# Altium PCB SEG_pressure gauge_up  V2.1.PcbDoc (part 1 of 5)
Units mm, origin at the board's own origin, x right, y up, seen from the top; angles counter-clockwise.
Board outline 67.74 x 67.74 mm, 2 copper layers (Top Layer, Bottom Layer); 36 components, 59 nets, 200 pads, 20 vias.
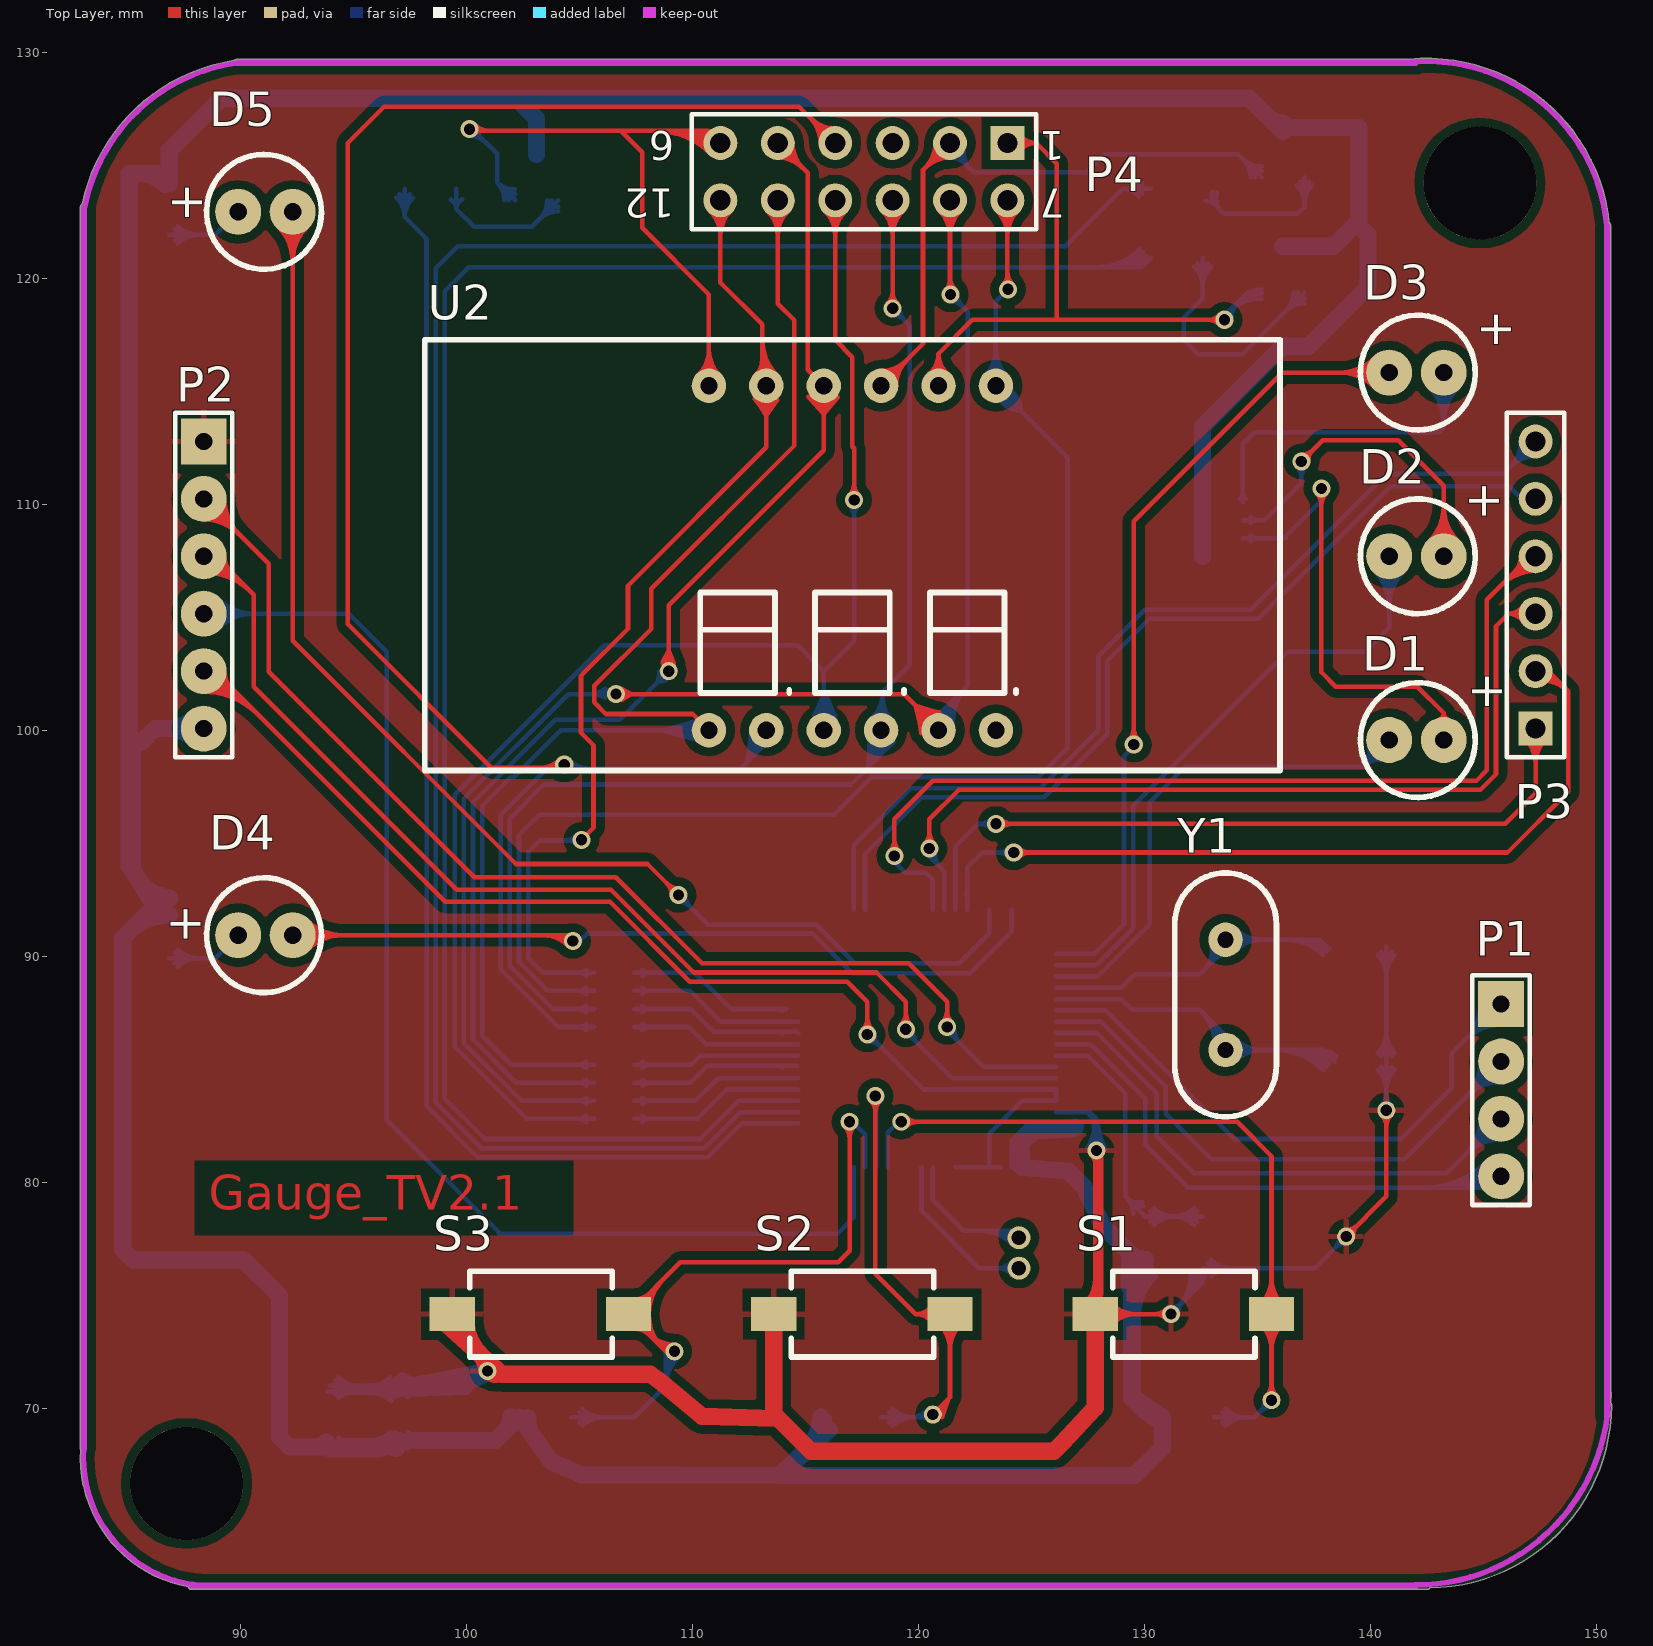
[diagram p0: Top Layer view]
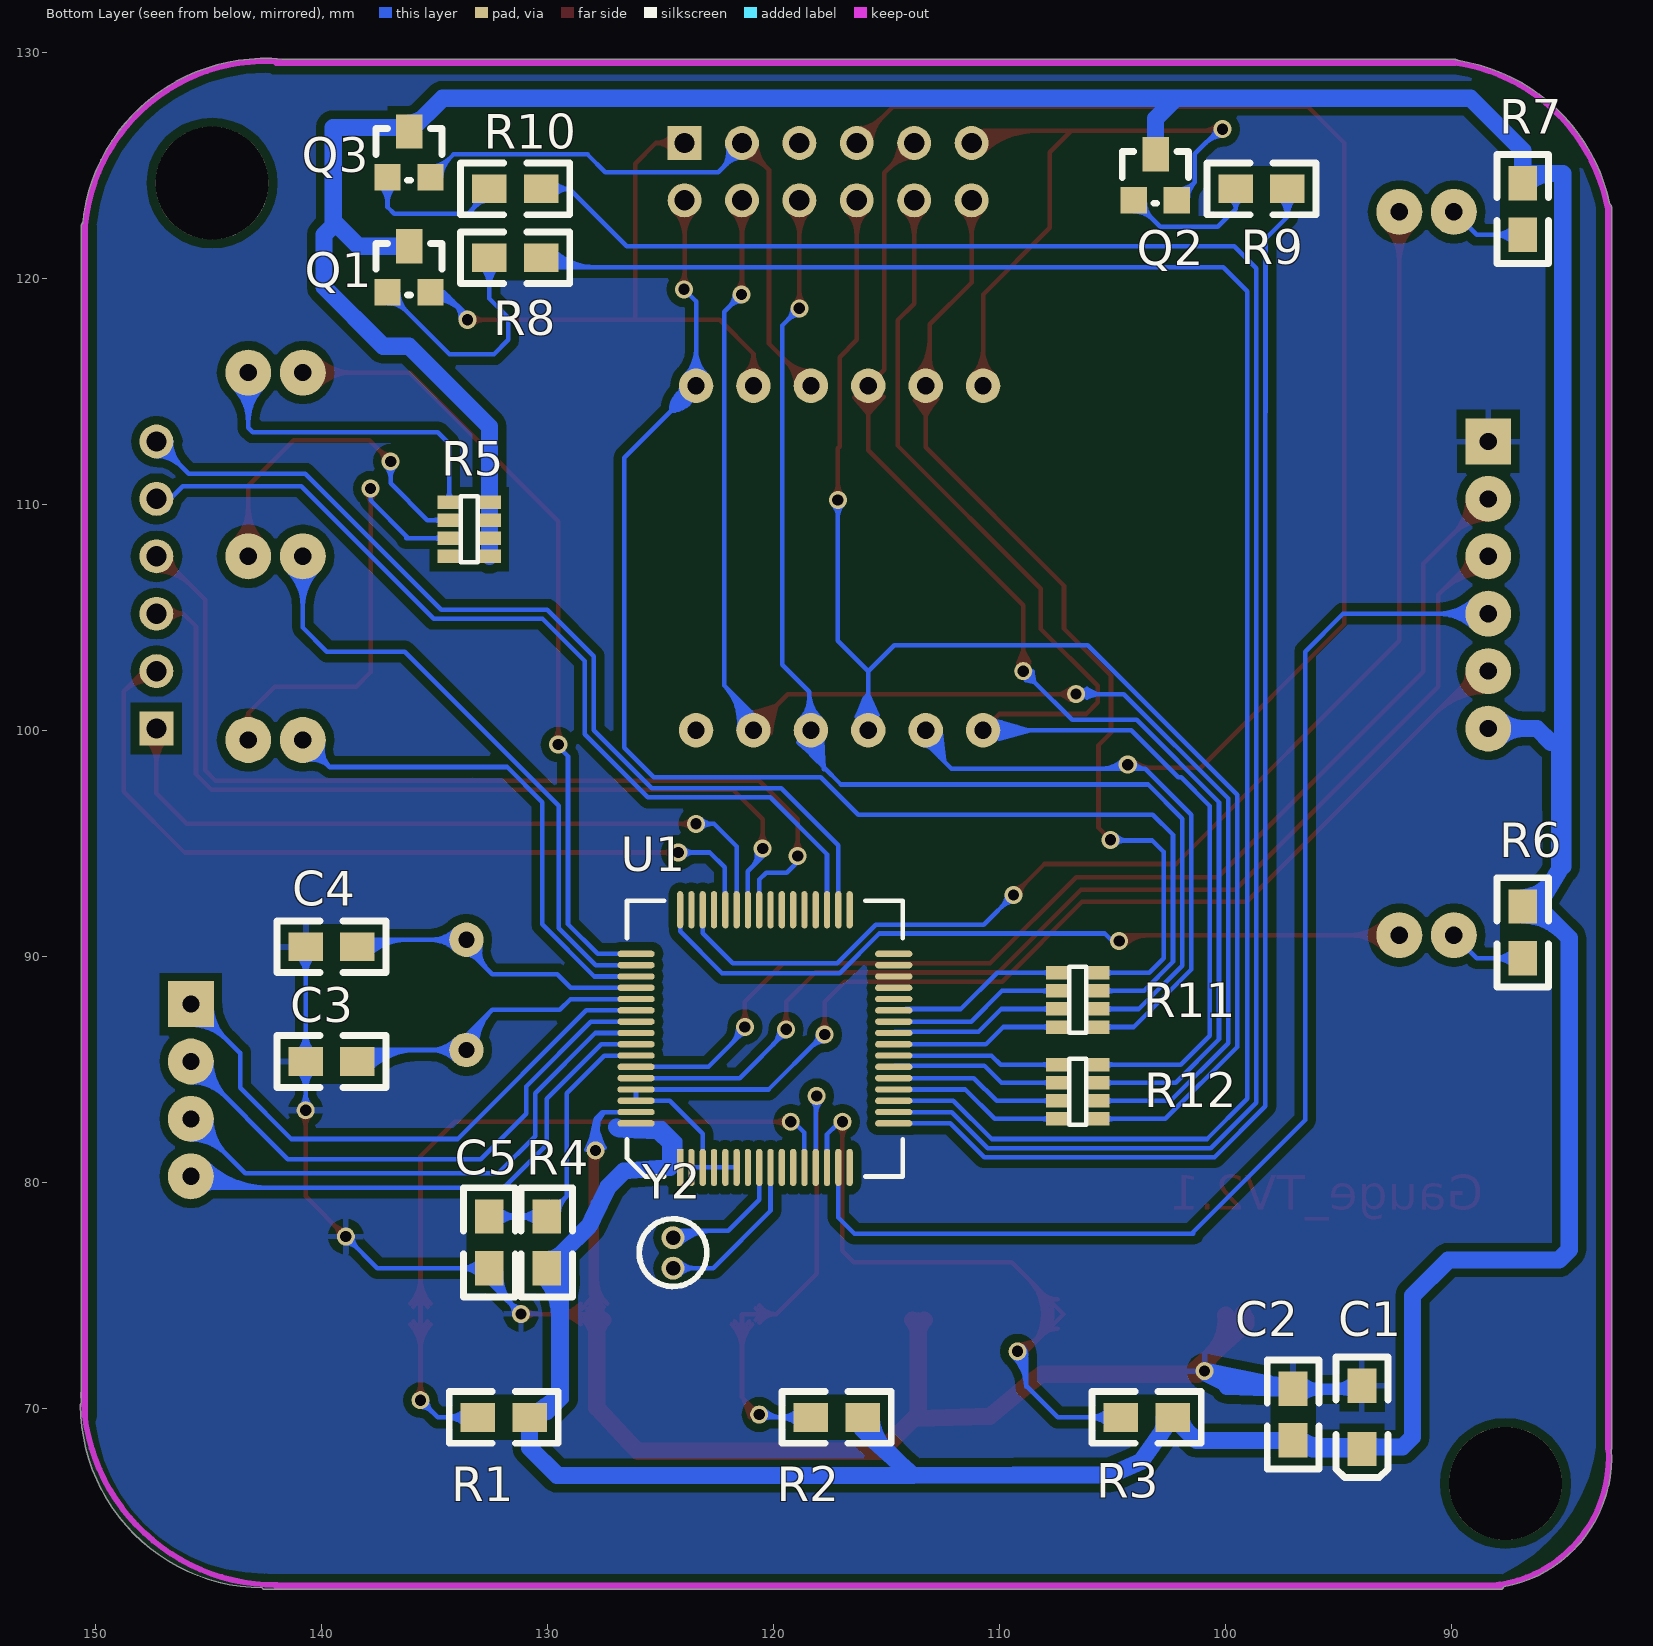
[diagram p1: Bottom Layer view, seen from below]
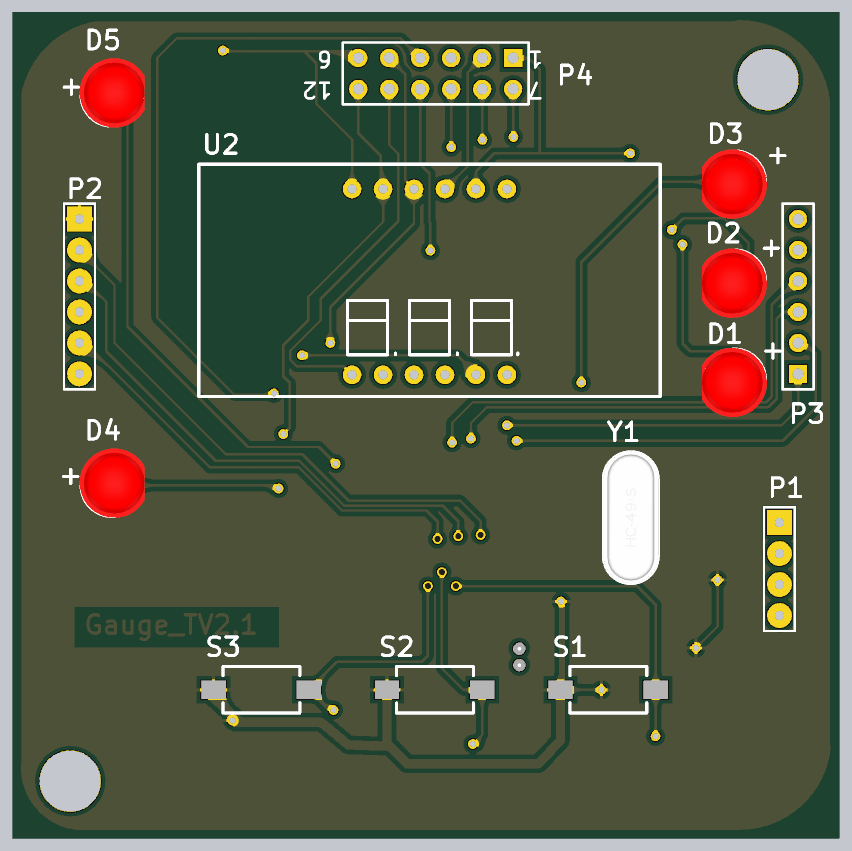
[diagram p6: 3D render of the assembled board from above, using the file's embedded part models]
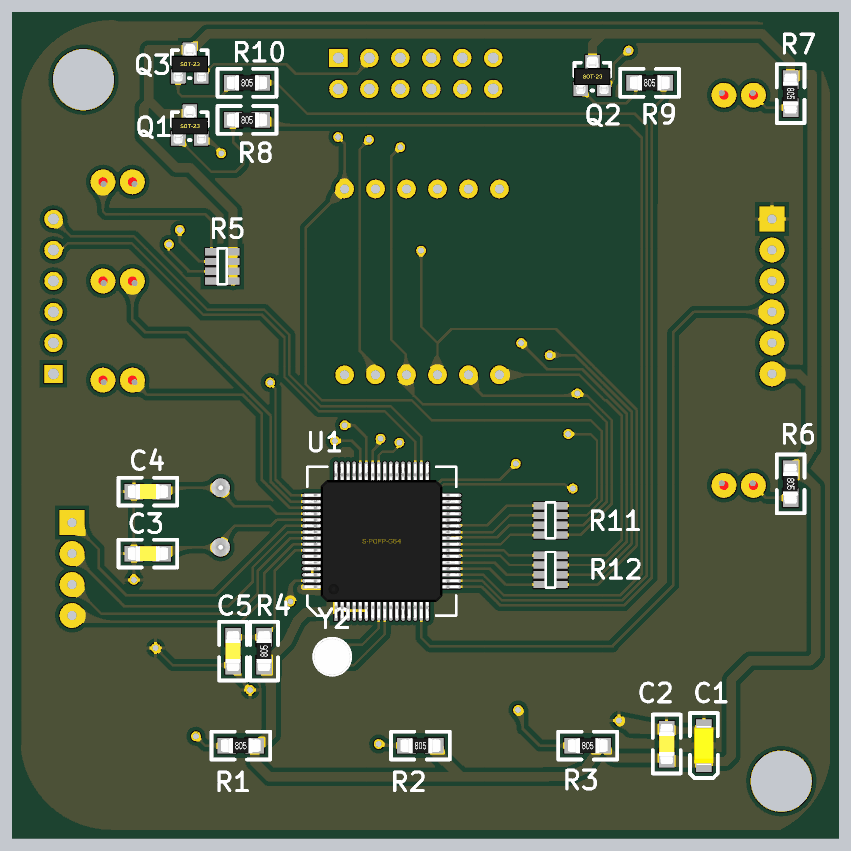
[diagram p7: 3D render of the assembled board from below, using the file's embedded part models]

## Layer stack, top to bottom
Top Layer: signal copper 0.0356
Dielectric: core 0.32, FR-4, Dk 4.8
Bottom Layer: signal copper 0.0356

## Board outline
82.95,68.165 ccw(c88.735,67.805) 87.712,62.1 ccw(c87.859,62.133) 87.859,61.983 142.519,61.983 ccw(c142.519,62.133) 142.646,62.052 ccw(c142.554,70.179) 150.681,70.144 ccw(c150.554,70.144) 150.681,70.144 ccw(c150.554,70.144) 150.638,70.24 150.638,122.326 ccw(c150.488,122.326) 150.589,122.438 ccw(c142.505,121.599) 141.74,129.69 ccw(c141.752,129.563) 141.709,129.683 89.865,129.683 ccw(c89.865,129.533) 89.754,129.634 ccw(c89.736,129.508) 89.717,129.634 ccw(c90.968,121.604) 83.013,123.269 ccw(c83.088,123.139) 82.938,123.139 82.938,68.224 ccw(c83.088,68.224)

## Design rules (kind name [scope] priority, off if disabled: settings)
Clearance [All] p1: gap=0.152
PolygonConnect [All] p1: connectstyle=Relief reliefconductorwidth=0.254 reliefentries=4 polygonreliefangle="90 Angle"
RoutingVias [All] p1: holewidth=0.5 width=0.8 viastyle="Through Hole" minholewidth=0.711 minwidth=1.27 maxholewidth=0.711 maxwidth=1.27
SilkscreenOverComponentPads [All] p1: minsilkscreentomaskgap=0.254
SolderMaskExpansion [All] p1: expansion=0.102
Width [All] p1: maxlimit=0.762 minlimit=0.203 preferedwidth=0.762
27 further rules are at their usual default settings.

## Classes and differential pairs
component class "SEG_pressure gauge_up  V2.1": C1 C2 C3 C4 C5 D1 D2 D3 D4 D5 P1 P2 P3 P4 Q1 Q2 Q3 R1 R3 R4 R5 R6 R7 R8 R9 R10 R11 S1 S2 S3 U1 U2 Y1 Y2

## Components (designator, comment, footprint, x,y, rotation, side; value= is the part's Value field where it differs from the comment)
C1 "10uf" 3216 93.98,69.596 r270 bottom
C2 "100nf" 0805_C_Y 97.028,68.58 r90 bottom
C3 "12pf" 0805_C_Y 140.716,85.344 r180 bottom
C4 "12pf" 0805_C_Y 140.716,90.424 r180 bottom
C5 "100nf" 0805_C_Y 132.588,76.2 r90 bottom
D1 "LED" LED 143.256,99.568 r180 top
D2 "LED" LED 143.256,107.696 r180 top
D3 "LED" LED 143.256,115.824 r180 top
D4 "LED" LED 89.916,90.932 r0 top locked
D5 "LED" LED 89.916,122.936 r0 top locked
P1 "Header 4*2.54" HDR1X4 145.796,87.884 r270 top
P2 "Header 6*2.54" HDR1X6#1 88.392,112.776 r270 top
P3 "Header 6*2.54" HDR1X6#2 147.32,100.076 r90 top
P4 "Header 6X2*2.54" HDR2X6_CEN 123.952,125.984 r180 top
Q1 "S8050" SOT-23_Y 136.144,120.396 r180 bottom
Q2 "S8050" SOT-23_Y 103.124,124.46 r180 bottom
Q3 "S8050" SOT-23_Y 136.144,125.476 r180 bottom
R1 "1k" 0805_R_Y 133.096,69.596 r180 bottom
R2 "1k" 0805_R_Y 118.364,69.596 r180 bottom
R3 "1k" 0805_R_Y 104.648,69.596 r180 bottom
R4 "100k" 0805_R_Y 130.048,76.2 r90 bottom
R5 "排阻470*4" 8P4R_0603 132.588,107.696 r0 bottom
R6 "470" 0805_R_Y 86.868,92.202 r270 bottom
R7 "470" 0805_R_Y 86.868,124.206 r270 bottom
R8 "330" 0805_R_Y 132.588,120.904 r180 bottom
R9 "330" 0805_R_Y 99.568,123.952 r180 bottom
R10 "330" 0805_R_Y 132.588,123.952 r180 bottom
R11 "排阻470*4" 8P4R_0603 105.664,86.868 r0 bottom
R12 "排阻470*4" 8P4R_0603 105.664,82.804 r0 bottom
S1 "SW-PB" SW-SMD1 135.636,74.168 r180 top locked
S2 "SW-PB" SW-SMD1 121.412,74.168 r180 top locked
S3 "SW-PB" SW-SMD1 107.188,74.168 r180 top locked
U1 "MSP430F14X" S-PQFP-G64_Y 120.396,86.36 r180 bottom locked
U2 "3位共阳极数码管" 3位数码管0.56 110.744,100 r0 top locked
Y1 "晶振8M" HC-49/S_Y 133.604,85.852 r90 top
Y2 "晶振32.768k" Crastal_32.768_Y 124.46,76.2 r90 bottom

## Footprints (in the part's own frame and the unit in brackets; to place one, negate y for a bottom-side part, rotate by r counter-clockwise, add the part's x,y. Pads: shape width x height; smd on the part's side, far side on the other; paste and mask are expansions set on the pad)
3位数码管0.56 [mil]
  round 60 hole 30: 1(0,600) 2(300,600) 3(400,600) 6(500,0) a(100,600) b(500,600) c(300,0) d(100,0) dot(200,0) e(0,0) f(200,600) g(400,0)
  silkscreen extent -495,-70 995,680
8P4R_0603 [mm]
  rect 1.016x0.6 smd: 1(0,0) 2(1.778,0) 3(0,-0.8) 4(1.778,-0.8) 5(0,-1.6) 6(1.778,-1.6) 7(0,-2.4) 8(1.778,-2.4)
  silkscreen extent 0.51,-2.67 1.27,0.25
0805_C_Y [mil] "0805贴片电容（已加焊）"
  rect 60x50 smd: 1(0,0) 2(90,0)
  silkscreen extent -50,-45 140,45, body extent -27,-25 117,25, height 14
0805_R_Y [mil]
  rect 60x50 smd: 1(0,0) 2(90,0)
  silkscreen extent -50,-45 140,45, body extent -27,-25 117,25, height 14
3216 [mil]
  rect 60x50 smd: 1(55,0) 2(-55,0)
  silkscreen extent -105,-45 105,45, body extent -63,-31 63,31, height 63
Crastal_32.768_Y [mil]
  round 40 hole 25: 1(0,0) 2(53,0)
  silkscreen extent -32,-59 86,59, body extent -33,-59 85,59, height 354
HC-49/S_Y [mil] "短型晶振（已加焊）"
  round 60 hole 28: 1(0,0) 2(192,0)
  silkscreen extent -116,-88 308,89, body extent -116,-89 309,88, height 138
HDR1X4 [mil] "Connector; Header; 4 Position"
  rect 80x80 hole 30: 1(0,0)
  round 80 hole 30: 2(100,0) 3(200,0) 4(300,0)
  silkscreen extent -50,-50 350,50
HDR1X6#1 [mil] "Connector; Header; 6 Position"
  rect 80x80 hole 30: 1(0,0)
  round 80 hole 30: 2(100,0) 3(200,0) 4(300,0) 5(400,0) 6(500,0)
  silkscreen extent -50,-50 550,50
HDR1X6#2 [mil] "Connector; Header; 6 Position"
  rect 59.06x59.06 hole 35.43: 1(0,0)
  round 59.06 hole 35.43: 2(100,0) 3(200,0) 4(300,0) 5(400,0) 6(500,0)
  silkscreen extent -50,-50 550,50
HDR2X6_CEN [mm] "Connector; Header; 6x2 Position"
  rect 1.5x1.5 hole 0.9: 1(0,0)
  round 1.5 hole 0.9: 2(2.54,0) 3(5.08,0) 4(7.62,0) 5(10.16,0) 6(12.7,0) 7(0,2.54) 8(2.54,2.54) 9(5.08,2.54) 10(7.62,2.54) 11(10.16,2.54) 12(12.7,2.54)
  silkscreen extent -1.27,-1.27 13.97,3.81
LED [mil]
  round 80 hole 30: 1(0,0) 2(95,0)
  silkscreen extent -55,-100 145,100, body extent -60,-105 151,119, height 339
S-PQFP-G64_Y [mil]
  rect 11x65 smd: 1(-147.76,-224.58)
  oval 11x65 smd: 2(-128.08,-224.58) 3(-108.39,-224.58) 4(-88.71,-224.58) 5(-69.02,-224.58) 6(-49.34,-224.58) 7(-29.65,-224.58) 8(-9.97,-224.58) 9(9.72,-224.58) 10(29.4,-224.58) 11(49.09,-224.58) 12(68.77,-224.58) 13(88.46,-224.58) 14(108.14,-224.58) 15(127.83,-224.58) 16(147.51,-224.58) 33(147.51,224.24) 34(127.83,224.24) 35(108.14,224.24) 36(88.46,224.24) 37(68.77,224.24) 38(49.09,224.24) 39(29.4,224.24) 40(9.72,224.24) 41(-9.97,224.24) 42(-29.65,224.24) 43(-49.34,224.24) 44(-69.02,224.24) 45(-88.71,224.24) 46(-108.39,224.24) 47(-128.08,224.24) 48(-147.76,224.24)
  oval 65x11 smd: 17(224.28,-147.81) 18(224.28,-128.13) 19(224.28,-108.44) 20(224.28,-88.76) 21(224.28,-69.07) 22(224.28,-49.39) 23(224.28,-29.7) 24(224.28,-10.02) 25(224.28,9.67) 26(224.28,29.35) 27(224.28,49.04) 28(224.28,68.72) 29(224.28,88.41) 30(224.28,108.09) 31(224.28,127.78) 32(224.28,147.46) 49(-224.54,147.46) 50(-224.54,127.78) 51(-224.54,108.09) 52(-224.54,88.41) 53(-224.54,68.72) 54(-224.54,49.04) 55(-224.54,29.35) 56(-224.54,9.67) 57(-224.54,-10.02) 58(-224.54,-29.7) 59(-224.54,-49.39) 60(-224.54,-69.07) 61(-224.54,-88.76) 62(-224.54,-108.44) 63(-224.54,-128.13) 64(-224.54,-147.81)
  silkscreen extent -240,-240 240,240, body extent -257,-257 257,257, height 62
SOT-23_Y [mil] "IMP809T（已加焊）"
  rect 46x46 smd: 1(-37.5,-40) 2(37.5,-40)
  rect 46x60 smd: 3(0.5,40)
  silkscreen extent -58,-45 58,45, body extent -60,-63 61,70, height 39
SW-SMD1 [mm]
  rect 2x1.5 smd: 1(0,0) 2(7.8,0)
  silkscreen extent 0.73,-1.9 7.03,1.9, body extent -0.06,-1.94 7.83,1.91, height 2.5

## Part data
C1: library part "Cap Pol2", "Polarized Capacitor (Axial)"
C2 C3 C4 C5: library part Cap, "Capacitor"
D1 D2 D3 D4 D5: library part LED0, "Typical INFRARED GaAs LED"
P1: library part "Header 4", "Header, 4-Pin"
P2 P3: library part "Header 6", "Header, 6-Pin"
P4: library part "Header 6X2A", "Header, 6-Pin, Dual row"
Q1 Q2 Q3: library part 2N3904, "NPN General Purpose Amplifier"
R1 R2 R3 R4 R6 R7 R8 R9 R10: library part Res2, "Resistor"
R5 R11 R12: library part "排阻 8P4R"
S1 S2 S3: "Switch"
Y1 Y2: library part XTAL, "Crystal Oscillator"

## Free pads (board coordinates)
  round 5 hole 5: 0(87.63,66.675) 0(144.856,124.206)
  round 0.8 hole 0.5: 0(119.253,82.677) 0(120.65,69.723) 1(135.636,70.358) 2(116.967,82.677) 2(138.938,77.597) 3(118.11,83.82) 3(140.716,83.185) 4(127.889,81.407) 4(131.191,74.168) 13(106.629,101.6) 14(108.966,102.616) 18(100.944,71.649) 19(109.22,72.517)

## Via types
v1: diameter 0.8, hole 0.5, Top Layer to Bottom Layer, 20 vias

## Nets (pads, with @x,y where several pads share a name; then routed paths per layer and width w, separated by ;. In a path a pad name is that pad's centre, name@x,y a point inside that pad or via, vN(x,y) a via of type N, cw(c..) or ccw(c..) an arc to the next point about the centre after c; other vN are vias at no path point)
3.3V: C1.1 C2.1 P2.6 Q1.3 Q2.3 Q3.3 R1.2 R2.2 R3.2 R4.1 R5.1 R5.3 R5.5 R5.7 R6.1 R7.1 U1.1 U1.64 | length 492.3
  Bottom Layer w0.203: 85.097,93.973 85.242,93.828 R6.1@86.868,92.202 ; C1.1@93.98,68.199 94.069,68.288 94.361,68.58 C2.1@97.028,68.58 101.295,68.58 101.346,68.58 R3.2@102.362,69.596 ; R3.2@102.362,69.342 102.997,68.707 104.306,67.398 104.648,67.056 105.08,67.056 113.538,67.056 R2.2@116.078,69.596 R2.2@116.078,69.063 ; U1.64@126.099,82.606 124.897,82.606 124.149,81.858 U1.1@124.149,80.656 124.612,80.656 126.481,80.656 126.644,80.493 ; 127.33,79.807 128.016,79.121 128.016,78.4 128.016,78.232 128.176,78.072 ; 129.375,76.873 R4.1@130.048,76.2 129.337,75.489 129.159,75.311 129.159,70.358 129.921,69.596 ; R1.2@130.81,69.012 R1.2@130.81,69.596 129.921,69.596 ; 85.741,93.329 ccw(c86.868,94.457) R6.1@86.868,92.862 ; 85.741,93.329 ccw(c86.868,94.457) R6.1@86.868,92.862 ; 85.741,93.329 ccw(c86.868,94.457) R6.1@86.868,92.862 ; 85.741,93.329 ccw(c86.868,94.457) R6.1@86.868,92.862 ; 85.741,93.329 ccw(c86.868,94.457) R6.1@86.868,92.862 ; 86.047,93.023 cw(c85.353,92.329) R6.1@86.335,92.329 ; 86.047,93.023 cw(c85.353,92.329) R6.1@86.335,92.329 ; 86.047,93.023 cw(c85.353,92.329) R6.1@86.335,92.329 ; 86.047,93.023 cw(c85.353,92.329) R6.1@86.335,92.329 ; 86.047,93.023 cw(c85.353,92.329) R6.1@86.335,92.329 ; 86.088,92.982 ccw(c86.868,93.763) R6.1@86.868,92.659 ; 86.088,92.982 ccw(c86.868,93.763) R6.1@86.868,92.659 ; 86.088,92.982 ccw(c86.868,93.763) R6.1@86.868,92.659 ; 86.088,92.982 ccw(c86.868,93.763) R6.1@86.868,92.659 ; 86.088,92.982 ccw(c86.868,93.763) R6.1@86.868,92.659 ; C1.1@94.07,68.236 cw(c94.9,67.406) 94.9,68.58 ; C1.1@94.07,68.236 cw(c94.9,67.406) 94.9,68.58 ; C1.1@94.07,68.236 cw(c94.9,67.406) 94.9,68.58 ; C1.1@94.07,68.236 cw(c94.9,67.406) 94.9,68.58 ; C1.1@94.07,68.236 cw(c94.9,67.406) 94.9,68.58 ; C1.1@94.213,68.093 cw(c95.39,66.916) 95.39,68.58 ; C1.1@94.213,68.093 cw(c95.39,66.916) 95.39,68.58 ; C1.1@94.213,68.093 cw(c95.39,66.916) 95.39,68.58 ; C1.1@94.213,68.093 cw(c95.39,66.916) 95.39,68.58 ; C1.1@94.213,68.093 cw(c95.39,66.916) 95.39,68.58 ; C1.1@94.357,67.949 cw(c95.881,66.425) 95.881,68.58 ; C1.1@94.357,67.949 cw(c95.881,66.425) 95.881,68.58 ; C1.1@94.357,67.949 cw(c95.881,66.425) 95.881,68.58 ; C1.1@94.357,67.949 cw(c95.881,66.425) 95.881,68.58 ; C1.1@94.357,67.949 cw(c95.881,66.425) 95.881,68.58 ; C1.1@94.357,68.703 ccw(c94.655,69.001) 94.655,68.58 ; C1.1@94.357,68.703 ccw(c94.655,69.001) 94.655,68.58 ; C1.1@94.357,68.703 ccw(c94.655,69.001) 94.655,68.58 ; C1.1@94.357,68.703 ccw(c94.655,69.001) 94.655,68.58 ; C1.1@94.357,68.703 ccw(c94.655,69.001) 94.655,68.58 ; 95.74,68.58 cw(c95.74,67.292) C2.1@96.651,68.203 ; 95.74,68.58 ccw(c95.74,69.868) C2.1@96.651,68.957 ; 95.74,68.58 cw(c95.74,67.292) C2.1@96.651,68.203 ; 95.74,68.58 ccw(c95.74,69.868) C2.1@96.651,68.957 ; 95.74,68.58 cw(c95.74,67.292) C2.1@96.651,68.203 ; 95.74,68.58 ccw(c95.74,69.868) C2.1@96.651,68.957 ; 95.74,68.58 cw(c95.74,67.292) C2.1@96.651,68.203 ; 95.74,68.58 ccw(c95.74,69.868) C2.1@96.651,68.957 ; 95.74,68.58 ccw(c95.74,69.868) C2.1@96.651,68.957 ; 95.74,68.58 cw(c95.74,67.292) C2.1@96.651,68.203 ; 96.231,68.58 cw(c96.231,67.783) C2.1@96.795,68.347 ; 96.231,68.58 ccw(c96.231,69.377) C2.1@96.795,68.813 ; 96.231,68.58 cw(c96.231,67.783) C2.1@96.795,68.347 ; 96.231,68.58 ccw(c96.231,69.377) C2.1@96.795,68.813 ; 96.231,68.58 cw(c96.231,67.783) C2.1@96.795,68.347 ; 96.231,68.58 ccw(c96.231,69.377) C2.1@96.795,68.813 ; 96.231,68.58 cw(c96.231,67.783) C2.1@96.795,68.347 ; 96.231,68.58 ccw(c96.231,69.377) C2.1@96.795,68.813 ; 96.231,68.58 ccw(c96.231,69.377) C2.1@96.795,68.813 ; 96.231,68.58 cw(c96.231,67.783) C2.1@96.795,68.347 ; C2.1@97.261,68.347 cw(c97.825,67.783) 97.825,68.58 ; C2.1@97.261,68.347 cw(c97.825,67.783) 97.825,68.58 ; C2.1@97.261,68.347 cw(c97.825,67.783) 97.825,68.58 ; C2.1@97.261,68.347 cw(c97.825,67.783) 97.825,68.58 ; C2.1@97.261,68.347 cw(c97.825,67.783) 97.825,68.58 ; C2.1@97.261,68.813 ccw(c97.825,69.377) 97.825,68.58 ; C2.1@97.261,68.813 ccw(c97.825,69.377) 97.825,68.58 ; C2.1@97.261,68.813 ccw(c97.825,69.377) 97.825,68.58 ; C2.1@97.261,68.813 ccw(c97.825,69.377) 97.825,68.58 ; C2.1@97.261,68.813 ccw(c97.825,69.377) 97.825,68.58 ; C2.1@97.405,68.203 cw(c98.316,67.292) 98.316,68.58 ; C2.1@97.405,68.203 cw(c98.316,67.292) 98.316,68.58 ; C2.1@97.405,68.203 cw(c98.316,67.292) 98.316,68.58 ; C2.1@97.405,68.203 cw(c98.316,67.292) 98.316,68.58 ; C2.1@97.405,68.203 cw(c98.316,67.292) 98.316,68.58 ; C2.1@97.405,68.957 ccw(c98.316,69.868) 98.316,68.58 ; C2.1@97.405,68.957 ccw(c98.316,69.868) 98.316,68.58 ; C2.1@97.405,68.957 ccw(c98.316,69.868) 98.316,68.58 ; C2.1@97.405,68.957 ccw(c98.316,69.868) 98.316,68.58 ; C2.1@97.405,68.957 ccw(c98.316,69.868) 98.316,68.58 ; 101.41,68.644 ccw(c100.67,69.383) R3.2@101.706,69.524 ; 101.41,68.644 ccw(c100.67,69.383) R3.2@101.706,69.524 ; 101.41,68.644 ccw(c100.67,69.383) R3.2@101.706,69.524 ; 101.41,68.644 ccw(c100.67,69.383) R3.2@101.706,69.524 ; 101.41,68.644 ccw(c100.67,69.383) R3.2@101.706,69.524 ; 101.541,68.775 cw(c102.235,68.081) R3.2@102.235,69.063 ; 101.541,68.775 cw(c102.235,68.081) R3.2@102.235,69.063 ; 101.541,68.775 cw(c102.235,68.081) R3.2@102.235,69.063 ; 101.541,68.775 cw(c102.235,68.081) R3.2@102.235,69.063 ; 101.541,68.775 cw(c102.235,68.081) R3.2@102.235,69.063 ; 101.699,68.933 ccw(c101.18,69.453) R3.2@101.908,69.552 ; 101.699,68.933 ccw(c101.18,69.453) R3.2@101.908,69.552 ; 101.699,68.933 ccw(c101.18,69.453) R3.2@101.908,69.552 ; 101.699,68.933 ccw(c101.18,69.453) R3.2@101.908,69.552 ; 101.699,68.933 ccw(c101.18,69.453) R3.2@101.908,69.552 ; R3.2@102.489,69.063 cw(c102.489,68.695) 102.749,68.955 ; R3.2@102.489,69.063 cw(c102.489,68.695) 102.749,68.955 ; R3.2@102.489,69.063 cw(c102.489,68.695) 102.749,68.955 ; R3.2@102.489,69.063 cw(c102.489,68.695) 102.749,68.955 ; R3.2@102.489,69.063 cw(c102.489,68.695) 102.749,68.955 ; 114.951,68.469 ccw(c113.823,69.596) R2.2@115.418,69.596 ; 114.951,68.469 ccw(c113.823,69.596) R2.2@115.418,69.596 ; 114.951,68.469 ccw(c113.823,69.596) R2.2@115.418,69.596 ; 114.951,68.469 ccw(c113.823,69.596) R2.2@115.418,69.596 ; 114.951,68.469 ccw(c113.823,69.596) R2.2@115.418,69.596 ; 115.257,68.775 cw(c115.951,68.081) R2.2@115.951,69.063 ; 115.257,68.775 cw(c115.951,68.081) R2.2@115.951,69.063 ; 115.257,68.775 cw(c115.951,68.081) R2.2@115.951,69.063 ; 115.257,68.775 cw(c115.951,68.081) R2.2@115.951,69.063 ; 115.257,68.775 cw(c115.951,68.081) R2.2@115.951,69.063 ; 115.298,68.816 ccw(c114.517,69.596) R2.2@115.621,69.596 ; 115.298,68.816 ccw(c114.517,69.596) R2.2@115.621,69.596 ; 115.298,68.816 ccw(c114.517,69.596) R2.2@115.621,69.596 ; 115.298,68.816 ccw(c114.517,69.596) R2.2@115.621,69.596 ; 115.298,68.816 ccw(c114.517,69.596) R2.2@115.621,69.596 ; 129.096,75.248 cw(c129.835,74.508) R4.1@129.976,75.544 ; 129.096,75.248 cw(c129.835,74.508) R4.1@129.976,75.544 ; 129.096,75.248 cw(c129.835,74.508) R4.1@129.976,75.544 ; 129.096,75.248 cw(c129.835,74.508) R4.1@129.976,75.544 ; 129.096,75.248 cw(c129.835,74.508) R4.1@129.976,75.544 ; 129.227,75.379 ccw(c128.533,76.073) R4.1@129.515,76.073 ; 129.227,75.379 ccw(c128.533,76.073) R4.1@129.515,76.073 ; 129.227,75.379 ccw(c128.533,76.073) R4.1@129.515,76.073 ; 129.227,75.379 ccw(c128.533,76.073) R4.1@129.515,76.073 ; 129.227,75.379 ccw(c128.533,76.073) R4.1@129.515,76.073 ; 129.385,75.537 cw(c129.905,75.018) R4.1@130.004,75.746 ; 129.385,75.537 cw(c129.905,75.018) R4.1@130.004,75.746 ; 129.385,75.537 cw(c129.905,75.018) R4.1@130.004,75.746 ; 129.385,75.537 cw(c129.905,75.018) R4.1@130.004,75.746 ; 129.385,75.537 cw(c129.905,75.018) R4.1@130.004,75.746 ; 129.921,69.596 cw(c129.921,69.318) R1.2@130.182,69.413 ; 129.921,69.596 ccw(c129.921,69.874) R1.2@130.182,69.779 ; 129.921,69.596 cw(c129.921,69.318) R1.2@130.182,69.413 ; 129.921,69.596 ccw(c129.921,69.874) R1.2@130.182,69.779 ; 129.921,69.596 cw(c129.921,69.318) R1.2@130.182,69.413 ; 129.921,69.596 ccw(c129.921,69.874) R1.2@130.182,69.779 ; 129.921,69.596 cw(c129.921,69.318) R1.2@130.182,69.413 ; 129.921,69.596 ccw(c129.921,69.874) R1.2@130.182,69.779 ; 129.921,69.596 ccw(c129.921,69.874) R1.2@130.182,69.779 ; 129.921,69.596 cw(c129.921,69.318) R1.2@130.182,69.413
  Bottom Layer w0.762: 85.097,93.973 85.097,124.631 86.443,124.631 R7.1@86.868,124.206 86.868,125.654 89.179,127.965 102.21,127.965 ; P2.6@88.392,100.076 86.233,100.076 85.623,99.466 85.247,99.466 85.247,98.958 85.242,93.828 86.208,92.202 84.811,90.805 84.811,77.013 85.268,76.556 90.17,76.556 91.745,74.981 91.745,68.732 92.189,68.288 93.98,68.288 C1.1@94.069,68.288 ; C1.1@93.98,68.199 96.012,68.199 ; C2.1@97.028,68.58 96.012,68.199 ; 97.714,68.58 101.295,68.58 R3.2@102.362,69.596 102.997,68.707 103.759,67.64 104.306,67.398 105.08,67.056 113.843,67.031 ; Q2.3@103.111,125.476 103.111,127.063 102.21,127.965 ; R2.2@116.078,69.063 115.773,68.758 113.843,67.031 ; 124.452,80.958 124.405,81.005 124.405,80.886 124.612,80.656 126.644,80.493 127.33,79.807 128.016,78.4 128.176,78.072 129.375,76.873 129.357,76.219 129.337,75.489 ; 124.452,80.958 124.562,80.848 124.562,81.763 125.146,82.271 126.114,82.322 ; 126.114,82.322 126.594,82.347 ; R4.1@130.048,76.2 129.489,75.209 129.489,70.51 R1.2@130.81,69.596 130.81,68.25 129.591,67.031 113.843,67.031 ; R5.1@132.588,107.696 R5.3@132.588,108.496 R5.5@132.588,109.296 R5.7@132.588,110.096 132.588,113.436 136.144,116.992 137.287,116.992 139.903,119.609 139.903,121.92 139.395,122.428 ; Q1.3@136.131,121.412 138.379,121.412 139.395,122.428 ; 85.09,91.085 cw(c86.868,89.307) R6.1@86.868,91.821 ; 85.09,91.085 cw(c86.868,89.307) R6.1@86.868,91.821 ; 85.09,91.085 cw(c86.868,89.307) R6.1@86.868,91.821 ; 85.09,91.085 cw(c86.868,89.307) R6.1@86.868,91.821 ; 85.09,91.085 cw(c86.868,89.307) R6.1@86.868,91.821 ; 85.434,93.505 ccw(c87.07,94.476) R6.1@86.892,92.582 ; 85.434,93.505 ccw(c87.07,94.476) R6.1@86.892,92.582 ; 85.434,93.505 ccw(c87.07,94.476) R6.1@86.892,92.582 ; 85.434,93.505 ccw(c87.07,94.476) R6.1@86.892,92.582 ; 85.434,93.505 ccw(c87.07,94.476) R6.1@86.892,92.582 ; 85.536,124.631 cw(c85.536,123.001) R7.1@86.688,124.153 ; 85.536,124.631 cw(c85.536,123.001) R7.1@86.688,124.153 ; 85.536,124.631 cw(c85.536,123.001) R7.1@86.688,124.153 ; 85.536,124.631 cw(c85.536,123.001) R7.1@86.688,124.153 ; 85.536,124.631 cw(c85.536,123.001) R7.1@86.688,124.153 ; 86.199,92.217 ccw(c86.896,92.631) R6.1@86.82,91.823 ; 86.199,92.217 ccw(c86.896,92.631) R6.1@86.82,91.823 ; 86.199,92.217 ccw(c86.896,92.631) R6.1@86.82,91.823 ; 86.199,92.217 ccw(c86.896,92.631) R6.1@86.82,91.823 ; 86.199,92.217 ccw(c86.896,92.631) R6.1@86.82,91.823 ; 86.859,100.076 cw(c86.859,98.543) P2.6@87.943,99.627 ; 86.859,100.076 ccw(c86.859,101.609) P2.6@87.943,100.525 ; 86.859,100.076 cw(c86.859,98.543) P2.6@87.943,99.627 ; 86.859,100.076 ccw(c86.859,101.609) P2.6@87.943,100.525 ; 86.859,100.076 cw(c86.859,98.543) P2.6@87.943,99.627 ; 86.859,100.076 ccw(c86.859,101.609) P2.6@87.943,100.525 ; 86.859,100.076 cw(c86.859,98.543) P2.6@87.943,99.627 ; 86.859,100.076 ccw(c86.859,101.609) P2.6@87.943,100.525 ; 86.859,100.076 ccw(c86.859,101.609) P2.6@87.943,100.525 ; 86.859,100.076 cw(c86.859,98.543) P2.6@87.943,99.627 ; 93.275,68.288 ccw(c93.275,69.031) C1.1@93.8,68.506 ; 93.275,68.288 ccw(c93.275,69.031) C1.1@93.8,68.506 ; 93.275,68.288 ccw(c93.275,69.031) C1.1@93.8,68.506 ; 93.275,68.288 ccw(c93.275,69.031) C1.1@93.8,68.506 ; 93.275,68.288 ccw(c93.275,69.031) C1.1@93.8,68.506 ; 93.275,68.288 ccw(c93.275,69.031) C1.1@93.8,68.506 ; 93.275,68.288 ccw(c93.275,69.031) C1.1@93.8,68.506 ; 95.802,68.199 ccw(c95.802,69.679) C2.1@96.848,68.633 ; 95.802,68.199 ccw(c95.802,69.679) C2.1@96.848,68.633 ; 95.802,68.199 ccw(c95.802,69.679) C2.1@96.848,68.633 ; 95.802,68.199 ccw(c95.802,69.679) C2.1@96.848,68.633 ; 95.802,68.199 ccw(c95.802,69.679) C2.1@96.848,68.633 ; 96.012,68.199 ccw(c96.012,69.215) C2.1@96.825,68.605 ; 96.012,68.199 ccw(c96.012,69.215) C2.1@96.825,68.605 ; 96.012,68.199 ccw(c96.012,69.215) C2.1@96.825,68.605 ; 96.012,68.199 ccw(c96.012,69.215) C2.1@96.825,68.605 ; 96.012,68.199 ccw(c96.012,69.215) C2.1@96.825,68.605 ; 96.143,68.248 cw(c96.501,67.294) C2.1@96.923,68.222 ; 96.143,68.248 cw(c96.501,67.294) C2.1@96.923,68.222 ; 96.143,68.248 cw(c96.501,67.294) C2.1@96.923,68.222 ; 96.143,68.248 cw(c96.501,67.294) C2.1@96.923,68.222 ; 96.143,68.248 cw(c96.501,67.294) C2.1@96.923,68.222 ; R3.2@101.698,68.964 ccw(c101.069,69.624) R3.2@101.981,69.602 ; R3.2@101.698,68.964 ccw(c101.069,69.624) R3.2@101.981,69.602 ; R3.2@101.698,68.964 ccw(c101.069,69.624) R3.2@101.981,69.602 ; R3.2@101.698,68.964 ccw(c101.069,69.624) R3.2@101.981,69.602 ; R3.2@101.698,68.964 ccw(c101.069,69.624) R3.2@101.981,69.602 ; 102.21,127.965 134.658,127.965 Q3.3@136.131,126.492 136.309,126.67 139.497,126.67 139.497,122.428 139.395,122.428 ; R3.2@102.74,69.554 ccw(c103.692,69.395) 102.906,68.834 ; R3.2@102.74,69.554 ccw(c103.692,69.395) 102.906,68.834 ; R3.2@102.74,69.554 ccw(c103.692,69.395) 102.906,68.834 ; R3.2@102.74,69.554 ccw(c103.692,69.395) 102.906,68.834 ; R3.2@102.74,69.554 ccw(c103.692,69.395) 102.906,68.834 ; R3.2@102.74,69.554 ccw(c103.692,69.395) 102.906,68.834 ; R3.2@102.74,69.554 ccw(c103.692,69.395) 102.906,68.834 ; R3.2@102.74,69.554 ccw(c103.692,69.395) 102.906,68.834 ; R3.2@102.74,69.554 ccw(c103.692,69.395) 102.906,68.834 ; R3.2@102.74,69.554 ccw(c103.692,69.395) 102.906,68.834 ; R3.2@102.74,69.554 ccw(c103.692,69.395) 102.906,68.834 ; R3.2@102.74,69.554 ccw(c103.692,69.395) 102.906,68.834 ; R3.2@102.74,69.554 ccw(c103.692,69.395) 102.906,68.834 ; R3.2@102.74,69.554 ccw(c103.692,69.395) 102.906,68.834 ; R3.2@102.74,69.554 ccw(c103.692,69.395) 102.906,68.834 ; 114.921,67.995 ccw(c113.36,69.74) R2.2@115.697,69.61 ; 114.921,67.995 ccw(c113.36,69.74) R2.2@115.697,69.61 ; 114.921,67.995 ccw(c113.36,69.74) R2.2@115.697,69.61 ; 114.921,67.995 ccw(c113.36,69.74) R2.2@115.697,69.61 ; 114.921,67.995 ccw(c113.36,69.74) R2.2@115.697,69.61 ; 129.398,76.85 ccw(c130.048,77.501) R4.1@130.048,76.581 ; 129.398,76.85 ccw(c130.048,77.501) R4.1@130.048,76.581 ; 129.398,76.85 ccw(c130.048,77.501) R4.1@130.048,76.581 ; 129.398,76.85 ccw(c130.048,77.501) R4.1@130.048,76.581 ; 129.398,76.85 ccw(c130.048,77.501) R4.1@130.048,76.581 ; 129.489,74.111 cw(c132.01,74.111) R4.1@130.228,75.893 ; 129.489,74.111 cw(c132.01,74.111) R4.1@130.228,75.893 ; 129.489,74.111 cw(c132.01,74.111) R4.1@130.228,75.893 ; 129.489,74.111 cw(c132.01,74.111) R4.1@130.228,75.893 ; 129.489,74.111 cw(c132.01,74.111) R4.1@130.228,75.893 ; 129.489,75.044 cw(c130.292,75.044) R4.1@130.107,75.826 ; 129.489,75.044 cw(c130.292,75.044) R4.1@130.107,75.826 ; 129.489,75.044 cw(c130.292,75.044) R4.1@130.107,75.826 ; 129.489,75.044 cw(c130.292,75.044) R4.1@130.107,75.826 ; 129.489,75.044 cw(c130.292,75.044) R4.1@130.107,75.826 ; R4.1@129.618,75.438 cw(c130.338,75.032) R4.1@130.116,75.828 ; R4.1@129.618,75.438 cw(c130.338,75.032) R4.1@130.116,75.828 ; R4.1@129.618,75.438 cw(c130.338,75.032) R4.1@130.116,75.828 ; R4.1@129.618,75.438 cw(c130.338,75.032) R4.1@130.116,75.828 ; R4.1@129.618,75.438 cw(c130.338,75.032) R4.1@130.116,75.828 ; R1.2@130.076,70.104 cw(c129.587,69.397) R1.2@130.433,69.551 ; R1.2@130.076,70.104 cw(c129.587,69.397) R1.2@130.433,69.551 ; R1.2@130.076,70.104 cw(c129.587,69.397) R1.2@130.433,69.551 ; R1.2@130.076,70.104 cw(c129.587,69.397) R1.2@130.433,69.551 ; R1.2@130.076,70.104 cw(c129.587,69.397) R1.2@130.433,69.551 ; 135.481,127.142 ccw(c136.131,127.793) Q3.3@136.131,126.873 ; 135.481,127.142 ccw(c136.131,127.793) Q3.3@136.131,126.873 ; 135.481,127.142 ccw(c136.131,127.793) Q3.3@136.131,126.873 ; 126.781,82.357 ccw(c126.767,82.622) 126.964,82.444 cw(c126.767,82.622) 126.781,82.357
AD0: P2.2 U1.59 | length 105.6
  Top Layer w0.203: P2.2@88.392,110.236 91.262,107.366 91.262,102.591 100.355,93.497 106.629,93.497 110.439,89.687 119.583,89.687 121.285,87.986 v1(121.285,86.868) ; P2.2@88.392,109.322 cw(c88.392,107.114) 89.953,108.675 ; P2.2@88.392,109.322 cw(c88.392,107.114) 89.953,108.675 ; P2.2@88.392,109.322 cw(c88.392,107.114) 89.953,108.675 ; P2.2@88.392,109.322 cw(c88.392,107.114) 89.953,108.675 ; P2.2@88.392,109.322 cw(c88.392,107.114) 89.953,108.675 ; P2.2@88.392,109.525 cw(c88.392,107.808) 89.606,109.022 ; P2.2@88.392,109.525 cw(c88.392,107.808) 89.606,109.022 ; P2.2@88.392,109.525 cw(c88.392,107.808) 89.606,109.022 ; P2.2@88.392,109.525 cw(c88.392,107.808) 89.606,109.022 ; P2.2@88.392,109.525 cw(c88.392,107.808) 89.606,109.022 ; P2.2@88.392,109.728 cw(c88.392,108.502) 89.259,109.369 ; P2.2@88.392,109.728 cw(c88.392,108.502) 89.259,109.369 ; P2.2@88.392,109.728 cw(c88.392,108.502) 89.259,109.369 ; P2.2@88.392,109.728 cw(c88.392,108.502) 89.259,109.369 ; P2.2@88.392,109.728 cw(c88.392,108.502) 89.259,109.369 ; P2.2@88.9,110.236 ccw(c90.126,110.236) 89.259,109.369 ; P2.2@88.9,110.236 ccw(c90.126,110.236) 89.259,109.369 ; P2.2@88.9,110.236 ccw(c90.126,110.236) 89.259,109.369 ; P2.2@88.9,110.236 ccw(c90.126,110.236) 89.259,109.369 ; P2.2@88.9,110.236 ccw(c90.126,110.236) 89.259,109.369 ; P2.2@89.103,110.236 ccw(c90.82,110.236) 89.606,109.022 ; P2.2@89.103,110.236 ccw(c90.82,110.236) 89.606,109.022 ; P2.2@89.103,110.236 ccw(c90.82,110.236) 89.606,109.022 ; P2.2@89.103,110.236 ccw(c90.82,110.236) 89.606,109.022 ; P2.2@89.103,110.236 ccw(c90.82,110.236) 89.606,109.022 ; P2.2@89.306,110.236 ccw(c91.514,110.236) 89.953,108.675 ; P2.2@89.306,110.236 ccw(c91.514,110.236) 89.953,108.675 ; P2.2@89.306,110.236 ccw(c91.514,110.236) 89.953,108.675 ; P2.2@89.306,110.236 ccw(c91.514,110.236) 89.953,108.675 ; P2.2@89.306,110.236 ccw(c91.514,110.236) 89.953,108.675 ; v1@121.074,87.079 ccw(c120.565,87.588) 121.285,87.588 ; v1@121.074,87.079 ccw(c120.565,87.588) 121.285,87.588 ; v1@121.074,87.079 ccw(c120.565,87.588) 121.285,87.588 ; v1@121.074,87.079 ccw(c120.565,87.588) 121.285,87.588 ; v1@121.074,87.079 ccw(c120.565,87.588) 121.285,87.588 ; 121.285,87.588 ccw(c122.005,87.588) v1@121.496,87.079 ; 121.285,87.588 ccw(c122.005,87.588) v1@121.496,87.079 ; 121.285,87.588 ccw(c122.005,87.588) v1@121.496,87.079 ; 121.285,87.588 ccw(c122.005,87.588) v1@121.496,87.079 ; 121.285,87.588 ccw(c122.005,87.588) v1@121.496,87.079
  Bottom Layer w0.203: v1@121.285,86.716 122.895,85.106 U1.59@126.099,85.106 ; v1@121.285,86.57 cw(c121.285,86.217) 121.534,86.466 ; v1@121.285,86.57 cw(c121.285,86.217) 121.534,86.466 ; v1@121.285,86.57 cw(c121.285,86.217) 121.534,86.466 ; v1@121.285,86.57 cw(c121.285,86.217) 121.534,86.466 ; v1@121.285,86.57 cw(c121.285,86.217) 121.534,86.466 ; v1@121.38,86.868 ccw(c121.978,86.868) 121.555,86.445 ; v1@121.38,86.868 ccw(c121.978,86.868) 121.555,86.445 ; v1@121.38,86.868 ccw(c121.978,86.868) 121.555,86.445 ; v1@121.38,86.868 ccw(c121.978,86.868) 121.555,86.445 ; v1@121.38,86.868 ccw(c121.978,86.868) 121.555,86.445 ; v1@121.583,86.868 ccw(c122.672,86.868) 121.902,86.098 ; v1@121.583,86.868 ccw(c122.672,86.868) 121.902,86.098 ; v1@121.583,86.868 ccw(c122.672,86.868) 121.902,86.098 ; v1@121.583,86.868 ccw(c122.672,86.868) 121.902,86.098 ; v1@121.583,86.868 ccw(c122.672,86.868) 121.902,86.098
AD1: P2.3 U1.60 | length 102
  Top Layer w0.203: P2.3@88.392,107.696 88.9,107.696 90.602,105.994 90.602,101.93 99.593,92.939 106.41,92.939 110.068,89.281 118.161,89.281 119.456,87.986 v1(119.456,86.766) ; P2.3@88.392,106.985 cw(c88.392,104.041) 90.473,106.123 ; P2.3@88.392,106.985 cw(c88.392,104.041) 90.473,106.123 ; P2.3@88.392,106.985 cw(c88.392,104.041) 90.473,106.123 ; P2.3@88.392,106.985 cw(c88.392,104.041) 90.473,106.123 ; P2.3@88.392,106.985 cw(c88.392,104.041) 90.473,106.123 ; P2.3@88.392,107.188 cw(c88.392,104.735) 90.126,106.47 ; P2.3@88.392,107.188 cw(c88.392,104.735) 90.126,106.47 ; P2.3@88.392,107.188 cw(c88.392,104.735) 90.126,106.47 ; P2.3@88.392,107.188 cw(c88.392,104.735) 90.126,106.47 ; P2.3@88.392,107.188 cw(c88.392,104.735) 90.126,106.47 ; P2.3@88.392,107.391 cw(c88.392,105.429) 89.78,106.816 ; P2.3@88.392,107.391 cw(c88.392,105.429) 89.78,106.816 ; P2.3@88.392,107.391 cw(c88.392,105.429) 89.78,106.816 ; P2.3@88.392,107.391 cw(c88.392,105.429) 89.78,106.816 ; P2.3@88.392,107.391 cw(c88.392,105.429) 89.78,106.816 ; P2.3@88.392,107.594 cw(c88.392,106.123) 89.433,107.163 ; P2.3@88.392,107.594 cw(c88.392,106.123) 89.433,107.163 ; P2.3@88.392,107.594 cw(c88.392,106.123) 89.433,107.163 ; P2.3@88.392,107.594 cw(c88.392,106.123) 89.433,107.163 ; P2.3@88.392,107.594 cw(c88.392,106.123) 89.433,107.163 ; P2.3@89.306,107.696 ccw(c90.288,107.696) 89.594,107.002 ; P2.3@89.306,107.696 ccw(c90.288,107.696) 89.594,107.002 ; P2.3@89.306,107.696 ccw(c90.288,107.696) 89.594,107.002 ; P2.3@89.306,107.696 ccw(c90.288,107.696) 89.594,107.002 ; P2.3@89.306,107.696 ccw(c90.288,107.696) 89.594,107.002 ; v1@119.245,86.977 ccw(c118.736,87.487) 119.456,87.487 ; v1@119.245,86.977 ccw(c118.736,87.487) 119.456,87.487 ; v1@119.245,86.977 ccw(c118.736,87.487) 119.456,87.487 ; v1@119.245,86.977 ccw(c118.736,87.487) 119.456,87.487 ; v1@119.245,86.977 ccw(c118.736,87.487) 119.456,87.487 ; 119.456,87.487 ccw(c120.177,87.487) v1@119.667,86.977 ; 119.456,87.487 ccw(c120.177,87.487) v1@119.667,86.977 ; 119.456,87.487 ccw(c120.177,87.487) v1@119.667,86.977 ; 119.456,87.487 ccw(c120.177,87.487) v1@119.667,86.977 ; 119.456,87.487 ccw(c120.177,87.487) v1@119.667,86.977
  Bottom Layer w0.203: v1@119.494,86.627 121.515,84.606 U1.60@126.099,84.606 ; v1@119.456,86.468 cw(c119.456,85.993) 119.792,86.329 ; v1@119.456,86.468 cw(c119.456,85.993) 119.792,86.329 ; v1@119.456,86.468 cw(c119.456,85.993) 119.792,86.329 ; v1@119.456,86.468 cw(c119.456,85.993) 119.792,86.329 ; v1@119.456,86.468 cw(c119.456,85.993) 119.792,86.329 ; v1@119.551,86.766 ccw(c120.027,86.766) 119.691,86.43 ; v1@119.551,86.766 ccw(c120.027,86.766) 119.691,86.43 ; v1@119.551,86.766 ccw(c120.027,86.766) 119.691,86.43 ; v1@119.551,86.766 ccw(c120.027,86.766) 119.691,86.43 ; v1@119.551,86.766 ccw(c120.027,86.766) 119.691,86.43 ; v1@119.755,86.766 ccw(c120.72,86.766) 120.037,86.084 ; v1@119.755,86.766 ccw(c120.72,86.766) 120.037,86.084 ; v1@119.755,86.766 ccw(c120.72,86.766) 120.037,86.084 ; v1@119.755,86.766 ccw(c120.72,86.766) 120.037,86.084 ; v1@119.755,86.766 ccw(c120.72,86.766) 120.037,86.084
AGND: P2.5 U1.2 U1.3 U1.4 U1.5 U1.6 U1.61 U1.62 | length 116.2
  Top Layer w0.203: P2.5@89.103,102.616 P2.5@88.392,102.616 88.392,102.54 88.94,102.54 99.075,92.405 106.369,92.405 109.899,88.875 116.865,88.875 117.754,87.986 v1(117.754,86.538) ; P2.5@88.392,101.702 cw(c88.392,98.355) 90.758,100.721 ; P2.5@88.392,101.702 cw(c88.392,98.355) 90.758,100.721 ; P2.5@88.392,101.702 cw(c88.392,98.355) 90.758,100.721 ; P2.5@88.392,101.702 cw(c88.392,98.355) 90.758,100.721 ; P2.5@88.392,101.702 cw(c88.392,98.355) 90.758,100.721 ; P2.5@88.392,101.905 cw(c88.392,99.049) 90.411,101.068 ; P2.5@88.392,101.905 cw(c88.392,99.049) 90.411,101.068 ; P2.5@88.392,101.905 cw(c88.392,99.049) 90.411,101.068 ; P2.5@88.392,101.905 cw(c88.392,99.049) 90.411,101.068 ; P2.5@88.392,101.905 cw(c88.392,99.049) 90.411,101.068 ; P2.5@88.392,102.108 cw(c88.392,99.743) 90.065,101.415 ; P2.5@88.392,102.108 cw(c88.392,99.743) 90.065,101.415 ; P2.5@88.392,102.108 cw(c88.392,99.743) 90.065,101.415 ; P2.5@88.392,102.108 cw(c88.392,99.743) 90.065,101.415 ; P2.5@88.392,102.108 cw(c88.392,99.743) 90.065,101.415 ; P2.5@88.392,102.311 cw(c88.392,100.436) 89.718,101.762 ; P2.5@88.392,102.311 cw(c88.392,100.436) 89.718,101.762 ; P2.5@88.392,102.311 cw(c88.392,100.436) 89.718,101.762 ; P2.5@88.392,102.311 cw(c88.392,100.436) 89.718,101.762 ; P2.5@88.392,102.311 cw(c88.392,100.436) 89.718,101.762 ; P2.5@88.392,102.514 cw(c88.392,101.13) 89.371,102.109 ; P2.5@88.392,102.514 cw(c88.392,101.13) 89.371,102.109 ; P2.5@88.392,102.514 cw(c88.392,101.13) 89.371,102.109 ; P2.5@88.392,102.514 cw(c88.392,101.13) 89.371,102.109 ; P2.5@88.392,102.514 cw(c88.392,101.13) 89.371,102.109 ; P2.5@89.306,102.616 ccw(c90.375,102.616) 89.619,101.86 ; P2.5@89.306,102.616 ccw(c90.375,102.616) 89.619,101.86 ; P2.5@89.306,102.616 ccw(c90.375,102.616) 89.619,101.86 ; P2.5@89.306,102.616 ccw(c90.375,102.616) 89.619,101.86 ; P2.5@89.306,102.616 ccw(c90.375,102.616) 89.619,101.86 ; v1@117.543,86.749 ccw(c117.034,87.258) 117.754,87.258 ; v1@117.543,86.749 ccw(c117.034,87.258) 117.754,87.258 ; v1@117.543,86.749 ccw(c117.034,87.258) 117.754,87.258 ; v1@117.543,86.749 ccw(c117.034,87.258) 117.754,87.258 ; v1@117.543,86.749 ccw(c117.034,87.258) 117.754,87.258 ; 117.754,87.258 ccw(c118.475,87.258) v1@117.965,86.749 ; 117.754,87.258 ccw(c118.475,87.258) v1@117.965,86.749 ; 117.754,87.258 ccw(c118.475,87.258) v1@117.965,86.749 ; 117.754,87.258 ccw(c118.475,87.258) v1@117.965,86.749 ; 117.754,87.258 ccw(c118.475,87.258) v1@117.965,86.749
  Bottom Layer w0.203: v1@118.008,86.385 118.008,86.335 120.237,84.106 U1.61@126.099,84.106 U1.62@126.099,83.606 ; U1.6@121.649,80.656 U1.5@122.149,80.656 U1.4@122.649,80.656 U1.3@123.149,80.656 ; U1.2@123.649,80.656 U1.3@123.149,80.656 ; U1.62@126.088,83.617 U1.62@126.099,83.606 ; v1@117.754,86.239 cw(c117.754,85.396) 118.351,85.992 ; v1@117.754,86.239 cw(c117.754,85.396) 118.351,85.992 ; v1@117.754,86.239 cw(c117.754,85.396) 118.351,85.992 ; v1@117.754,86.239 cw(c117.754,85.396) 118.351,85.992 ; v1@117.754,86.239 cw(c117.754,85.396) 118.351,85.992 ; v1@118.053,86.538 ccw(c118.651,86.538) 118.228,86.115 ; v1@118.053,86.538 ccw(c118.651,86.538) 118.228,86.115 ; v1@118.053,86.538 ccw(c118.651,86.538) 118.228,86.115 ; v1@118.053,86.538 ccw(c118.651,86.538) 118.228,86.115 ; v1@118.053,86.538 ccw(c118.651,86.538) 118.228,86.115 ; U1.3@123.149,80.656 123.149,82.154 124.601,83.606 U1.62@126.099,83.606
BACK1: P3.3 U1.42 | length 64.2
  Top Layer w0.203: v1(120.498,94.767) 120.498,96.063 121.793,97.358 144.872,97.358 145.567,98.053 145.567,104.597 146.126,105.156 ; P3.3@147.32,105.156 146.126,105.156 ; v1@120.287,94.978 ccw(c119.777,95.488) 120.498,95.488 ; v1@120.287,94.978 ccw(c119.777,95.488) 120.498,95.488 ; v1@120.287,94.978 ccw(c119.777,95.488) 120.498,95.488 ; v1@120.287,94.978 ccw(c119.777,95.488) 120.498,95.488 ; v1@120.287,94.978 ccw(c119.777,95.488) 120.498,95.488 ; 120.498,95.488 ccw(c121.218,95.488) v1@120.709,94.978 ; 120.498,95.488 ccw(c121.218,95.488) v1@120.709,94.978 ; 120.498,95.488 ccw(c121.218,95.488) v1@120.709,94.978 ; 120.498,95.488 ccw(c121.218,95.488) v1@120.709,94.978 ; 120.498,95.488 ccw(c121.218,95.488) v1@120.709,94.978 ; 146.126,105.156 cw(c146.126,104.381) P3.3@146.776,104.803 ; 146.126,105.156 ccw(c146.126,105.931) P3.3@146.776,105.509 ; 146.126,105.156 cw(c146.126,104.381) P3.3@146.776,104.803 ; 146.126,105.156 ccw(c146.126,105.931) P3.3@146.776,105.509 ; 146.126,105.156 cw(c146.126,104.381) P3.3@146.776,104.803 ; 146.126,105.156 ccw(c146.126,105.931) P3.3@146.776,105.509 ; 146.126,105.156 cw(c146.126,104.381) P3.3@146.776,104.803 ; 146.126,105.156 ccw(c146.126,105.931) P3.3@146.776,105.509 ; 146.126,105.156 ccw(c146.126,105.931) P3.3@146.776,105.509 ; 146.126,105.156 cw(c146.126,104.381) P3.3@146.776,104.803 ; 146.5,105.156 cw(c146.5,104.624) P3.3@146.947,104.914 ; 146.5,105.156 ccw(c146.5,105.688) P3.3@146.947,105.398 ; 146.5,105.156 cw(c146.5,104.624) P3.3@146.947,104.914 ; 146.5,105.156 ccw(c146.5,105.688) P3.3@146.947,105.398 ; 146.5,105.156 cw(c146.5,104.624) P3.3@146.947,104.914 ; 146.5,105.156 ccw(c146.5,105.688) P3.3@146.947,105.398 ; 146.5,105.156 cw(c146.5,104.624) P3.3@146.947,104.914 ; 146.5,105.156 ccw(c146.5,105.688) P3.3@146.947,105.398 ; 146.5,105.156 ccw(c146.5,105.688) P3.3@146.947,105.398 ; 146.5,105.156 cw(c146.5,104.624) P3.3@146.947,104.914
  Bottom Layer w0.203: v1@120.421,94.488 121.149,93.76 U1.42@121.149,92.056 ; v1@120.589,94.74 ccw(c121.13,94.578) 120.731,94.179 ; v1@120.589,94.74 ccw(c121.13,94.578) 120.731,94.179 ; v1@120.589,94.74 ccw(c121.13,94.578) 120.731,94.179 ; v1@120.589,94.74 ccw(c121.13,94.578) 120.731,94.179 ; v1@120.589,94.74 ccw(c121.13,94.578) 120.731,94.179 ; v1@120.783,94.682 ccw(c121.501,94.467) 120.971,93.938 ; v1@120.783,94.682 ccw(c121.501,94.467) 120.971,93.938 ; v1@120.783,94.682 ccw(c121.501,94.467) 120.971,93.938 ; v1@120.783,94.682 ccw(c121.501,94.467) 120.971,93.938 ; v1@120.783,94.682 ccw(c121.501,94.467) 120.971,93.938
BACK2: P3.4 U1.41 | length 71.4
  Top Layer w0.203: v1(118.948,94.437) 118.948,96.063 120.65,97.765 144.704,97.765 145.161,98.222 145.161,105.766 147.091,107.696 P3.4@147.32,107.696 ; v1@118.737,94.648 ccw(c118.228,95.158) 118.948,95.158 ; v1@118.737,94.648 ccw(c118.228,95.158) 118.948,95.158 ; v1@118.737,94.648 ccw(c118.228,95.158) 118.948,95.158 ; v1@118.737,94.648 ccw(c118.228,95.158) 118.948,95.158 ; v1@118.737,94.648 ccw(c118.228,95.158) 118.948,95.158 ; 118.948,95.158 ccw(c119.669,95.158) v1@119.159,94.648 ; 118.948,95.158 ccw(c119.669,95.158) v1@119.159,94.648 ; 118.948,95.158 ccw(c119.669,95.158) v1@119.159,94.648 ; 118.948,95.158 ccw(c119.669,95.158) v1@119.159,94.648 ; 118.948,95.158 ccw(c119.669,95.158) v1@119.159,94.648 ; 145.823,106.427 cw(c147.32,104.93) P3.4@147.32,107.048 ; 145.823,106.427 cw(c147.32,104.93) P3.4@147.32,107.048 ; 145.823,106.427 cw(c147.32,104.93) P3.4@147.32,107.048 ; 145.823,106.427 cw(c147.32,104.93) P3.4@147.32,107.048 ; 145.823,106.427 cw(c147.32,104.93) P3.4@147.32,107.048 ; 146.17,106.774 cw(c147.32,105.624) P3.4@147.32,107.251 ; 146.17,106.774 cw(c147.32,105.624) P3.4@147.32,107.251 ; 146.17,106.774 cw(c147.32,105.624) P3.4@147.32,107.251 ; 146.17,106.774 cw(c147.32,105.624) P3.4@147.32,107.251 ; 146.17,106.774 cw(c147.32,105.624) P3.4@147.32,107.251 ; 146.375,106.979 ccw(c145.658,107.696) P3.4@146.672,107.696 ; 146.375,106.979 ccw(c145.658,107.696) P3.4@146.672,107.696 ; 146.375,106.979 ccw(c145.658,107.696) P3.4@146.672,107.696 ; 146.375,106.979 ccw(c145.658,107.696) P3.4@146.672,107.696 ; 146.375,106.979 ccw(c145.658,107.696) P3.4@146.672,107.696 ; 146.517,107.121 cw(c147.32,106.318) P3.4@147.32,107.454 ; 146.517,107.121 cw(c147.32,106.318) P3.4@147.32,107.454 ; 146.517,107.121 cw(c147.32,106.318) P3.4@147.32,107.454 ; 146.517,107.121 cw(c147.32,106.318) P3.4@147.32,107.454 ; 146.517,107.121 cw(c147.32,106.318) P3.4@147.32,107.454
  Bottom Layer w0.203: v1@118.923,94.209 119.431,93.701 120.345,93.701 120.649,93.397 U1.41@120.649,92.056
C1: R9.2 U1.17 | length 68.5
  Bottom Layer w0.203: R9.2@97.282,123.952 97.282,122.707 ; 98.247,114.078 98.247,121.742 97.282,122.707 ; 98.254,114.249 98.254,83.359 100.504,81.109 110.7,81.109 112.197,82.606 U1.17@114.699,82.606 ; R9.2@96.914,123.566 cw(c96.097,122.707) 97.282,122.707 ; R9.2@96.914,123.566 cw(c96.097,122.707) 97.282,122.707 ; R9.2@96.914,123.566 cw(c96.097,122.707) 97.282,122.707 ; R9.2@97.054,123.713 cw(c96.548,123.182) 97.282,123.182 ; R9.2@97.054,123.713 cw(c96.548,123.182) 97.282,123.182 ; R9.2@97.054,123.713 cw(c96.548,123.182) 97.282,123.182 ; 97.282,122.707 cw(c98.467,122.707) R9.2@97.65,123.566 ; 97.282,122.707 cw(c98.467,122.707) R9.2@97.65,123.566 ; 97.282,122.707 cw(c98.467,122.707) R9.2@97.65,123.566 ; 97.282,123.182 cw(c98.016,123.182) R9.2@97.51,123.713 ; 97.282,123.182 cw(c98.016,123.182) R9.2@97.51,123.713 ; 97.282,123.182 cw(c98.016,123.182) R9.2@97.51,123.713
C2: R10.2 U1.18 | length 100.6
  Bottom Layer w0.203: U1.18@114.699,83.106 112.126,83.106 110.533,81.512 100.671,81.512 98.657,83.526 98.657,120.436 99.633,121.412 126.517,121.412 129.057,123.952 ; R10.2@130.302,123.952 129.057,123.952 ; 129.057,123.952 cw(c129.057,123.048) R10.2@129.76,123.617 ; 129.057,123.952 ccw(c129.057,124.856) R10.2@129.76,124.287 ; 129.057,123.952 cw(c129.057,123.048) R10.2@129.76,123.617 ; 129.057,123.952 ccw(c129.057,124.856) R10.2@129.76,124.287 ; 129.057,123.952 cw(c129.057,123.048) R10.2@129.76,123.617 ; 129.057,123.952 ccw(c129.057,124.856) R10.2@129.76,124.287 ; 129.057,123.952 cw(c129.057,123.048) R10.2@129.76,123.617 ; 129.057,123.952 ccw(c129.057,124.856) R10.2@129.76,124.287 ; 129.057,123.952 ccw(c129.057,124.856) R10.2@129.76,124.287 ; 129.057,123.952 cw(c129.057,123.048) R10.2@129.76,123.617 ; 129.483,123.952 cw(c129.483,123.392) R10.2@129.918,123.744 ; 129.483,123.952 ccw(c129.483,124.512) R10.2@129.918,124.16 ; 129.483,123.952 cw(c129.483,123.392) R10.2@129.918,123.744 ; 129.483,123.952 ccw(c129.483,124.512) R10.2@129.918,124.16 ; 129.483,123.952 cw(c129.483,123.392) R10.2@129.918,123.744 ; 129.483,123.952 ccw(c129.483,124.512) R10.2@129.918,124.16 ; 129.483,123.952 cw(c129.483,123.392) R10.2@129.918,123.744 ; 129.483,123.952 ccw(c129.483,124.512) R10.2@129.918,124.16 ; 129.483,123.952 ccw(c129.483,124.512) R10.2@129.918,124.16 ; 129.483,123.952 cw(c129.483,123.392) R10.2@129.918,123.744
C3: R8.2 U1.19 | length 115.8
  Bottom Layer w0.203: U1.19@114.699,83.606 112.056,83.606 110.366,81.915 100.838,81.915 99.06,83.693 99.06,119.431 100.114,120.485 129.883,120.485 R8.2@130.302,120.904 ; 127.875,120.485 ccw(c127.875,123.204) R8.2@129.798,121.281 ; 127.875,120.485 ccw(c127.875,123.204) R8.2@129.798,121.281 ; 127.875,120.485 ccw(c127.875,123.204) R8.2@129.798,121.281 ; 127.875,120.485 ccw(c127.875,123.204) R8.2@129.798,121.281 ; 127.875,120.485 ccw(c127.875,123.204) R8.2@129.798,121.281 ; 128.366,120.485 ccw(c128.366,122.713) R8.2@129.942,121.137 ; 128.366,120.485 ccw(c128.366,122.713) R8.2@129.942,121.137 ; 128.366,120.485 ccw(c128.366,122.713) R8.2@129.942,121.137 ; 128.366,120.485 ccw(c128.366,122.713) R8.2@129.942,121.137 ; 128.366,120.485 ccw(c128.366,122.713) R8.2@129.942,121.137 ; 128.857,120.485 ccw(c128.857,122.222) R8.2@130.085,120.994 ; 128.857,120.485 ccw(c128.857,122.222) R8.2@130.085,120.994 ; 128.857,120.485 ccw(c128.857,122.222) R8.2@130.085,120.994 ; 128.857,120.485 ccw(c128.857,122.222) R8.2@130.085,120.994 ; 128.857,120.485 ccw(c128.857,122.222) R8.2@130.085,120.994 ; 129.347,120.485 ccw(c129.347,121.732) R8.2@130.229,120.85 ; 129.347,120.485 ccw(c129.347,121.732) R8.2@130.229,120.85 ; 129.347,120.485 ccw(c129.347,121.732) R8.2@130.229,120.85 ; 129.347,120.485 ccw(c129.347,121.732) R8.2@130.229,120.85 ; 129.347,120.485 ccw(c129.347,121.732) R8.2@130.229,120.85